# Altium PCB mt3608.PcbDoc
Units mm, origin at the board's own origin, x right, y up, seen from the top; angles counter-clockwise.
Board outline 25 x 30 mm, 2 copper layers (Top Layer, Bottom Layer), stack 1.671 mm thick; 7 components, 5 nets, 18 pads, 2 vias.
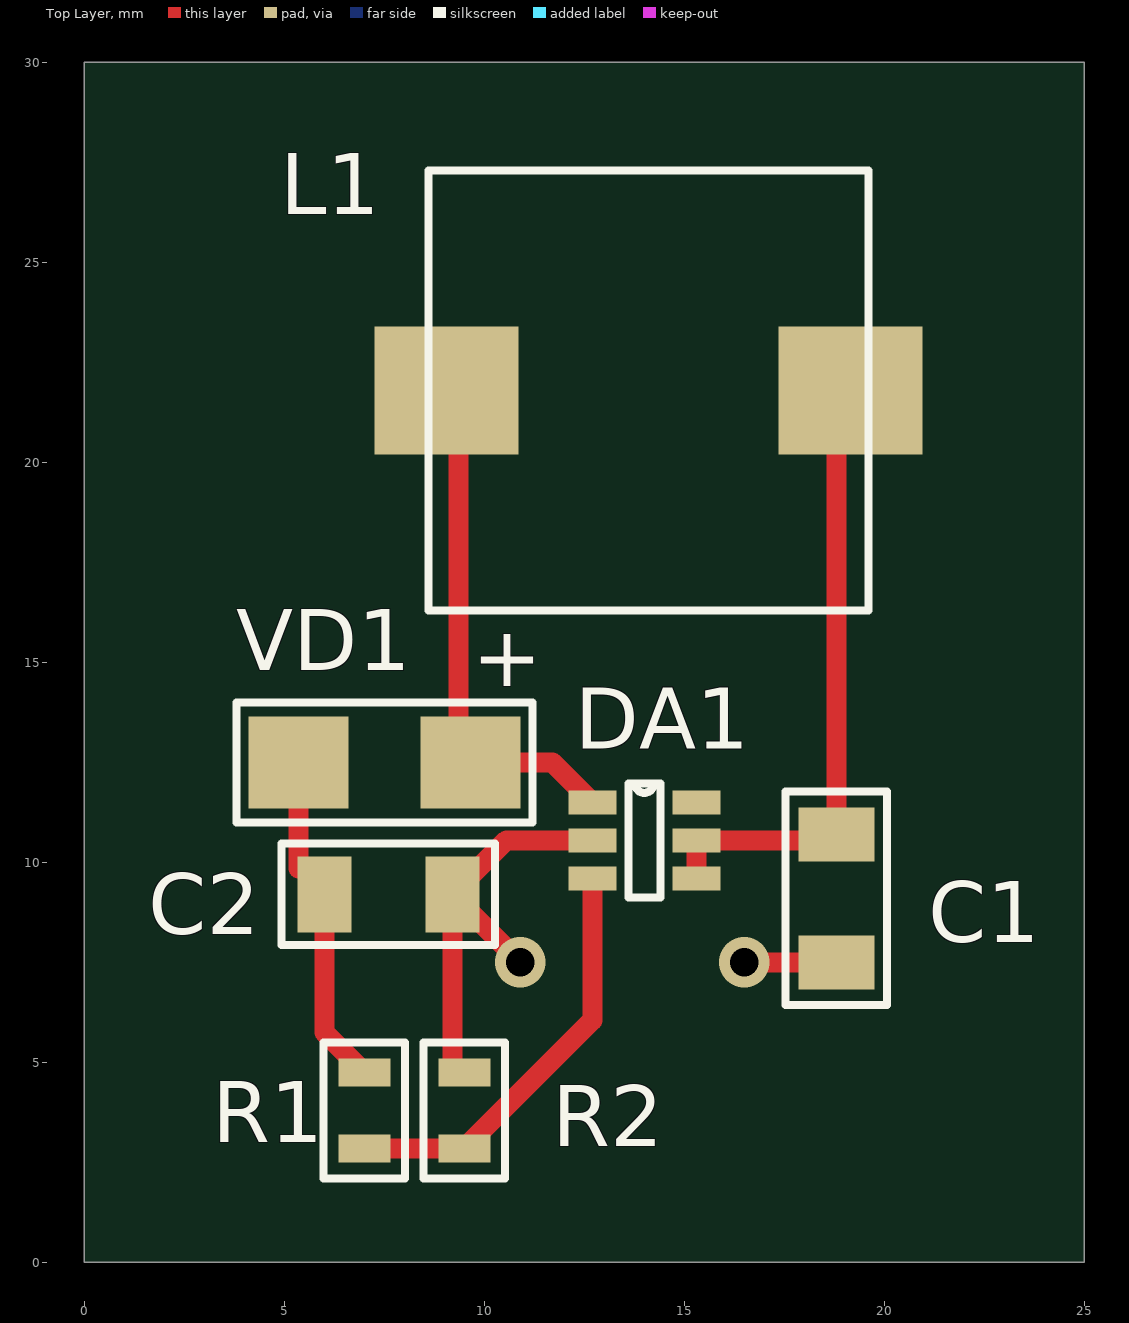
[diagram p0: Top Layer view]
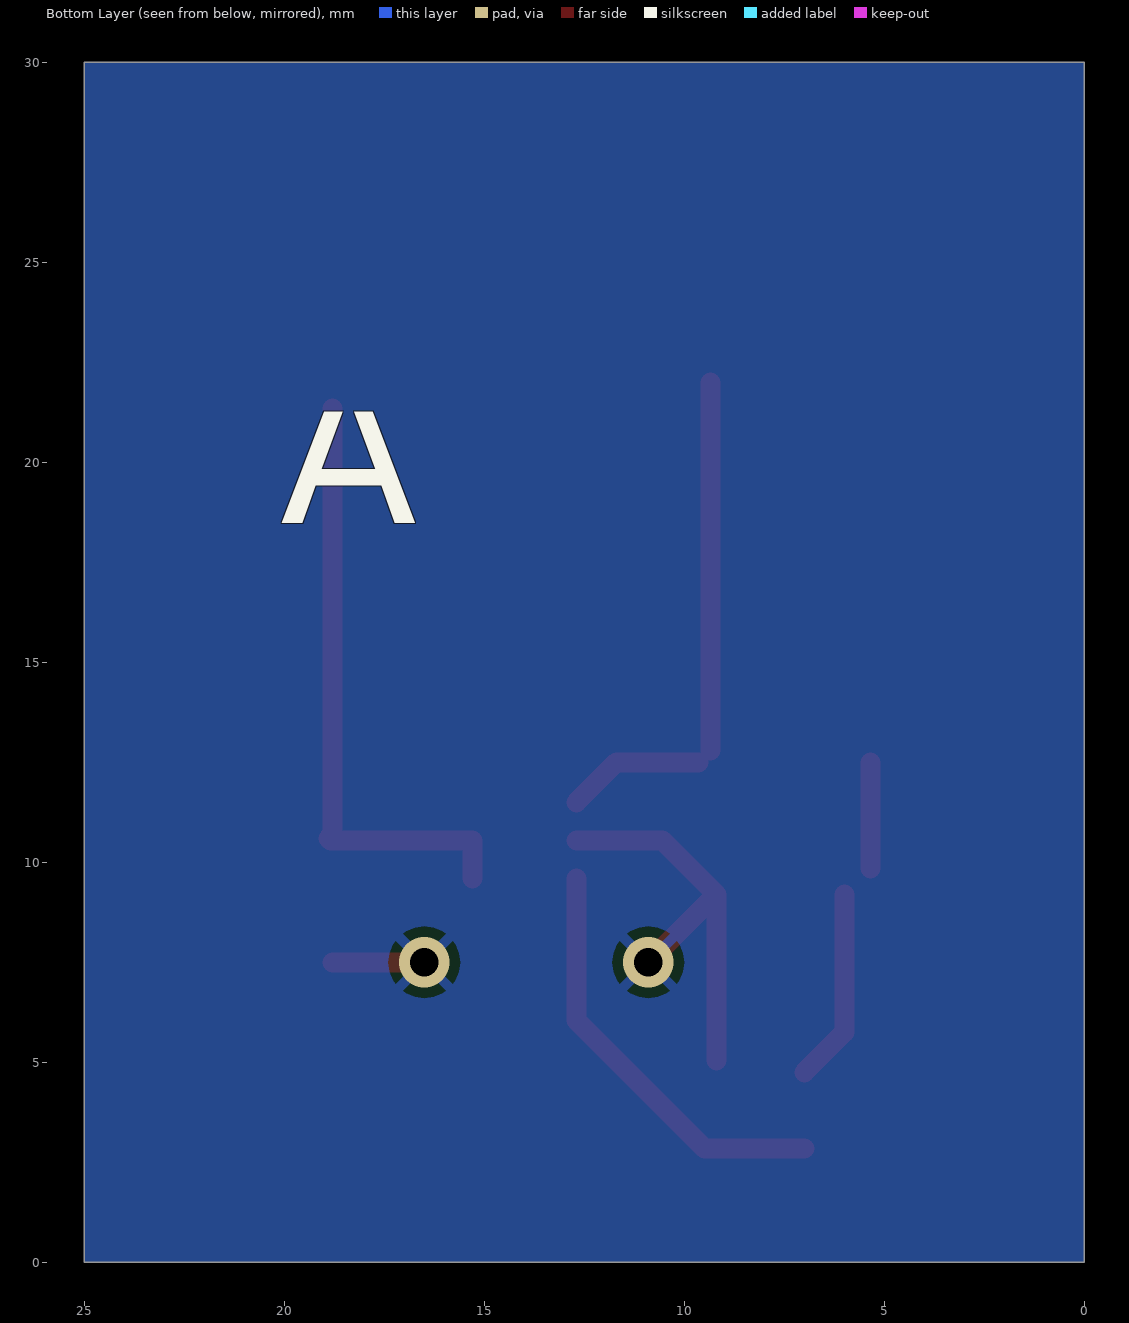
[diagram p1: Bottom Layer view, seen from below]
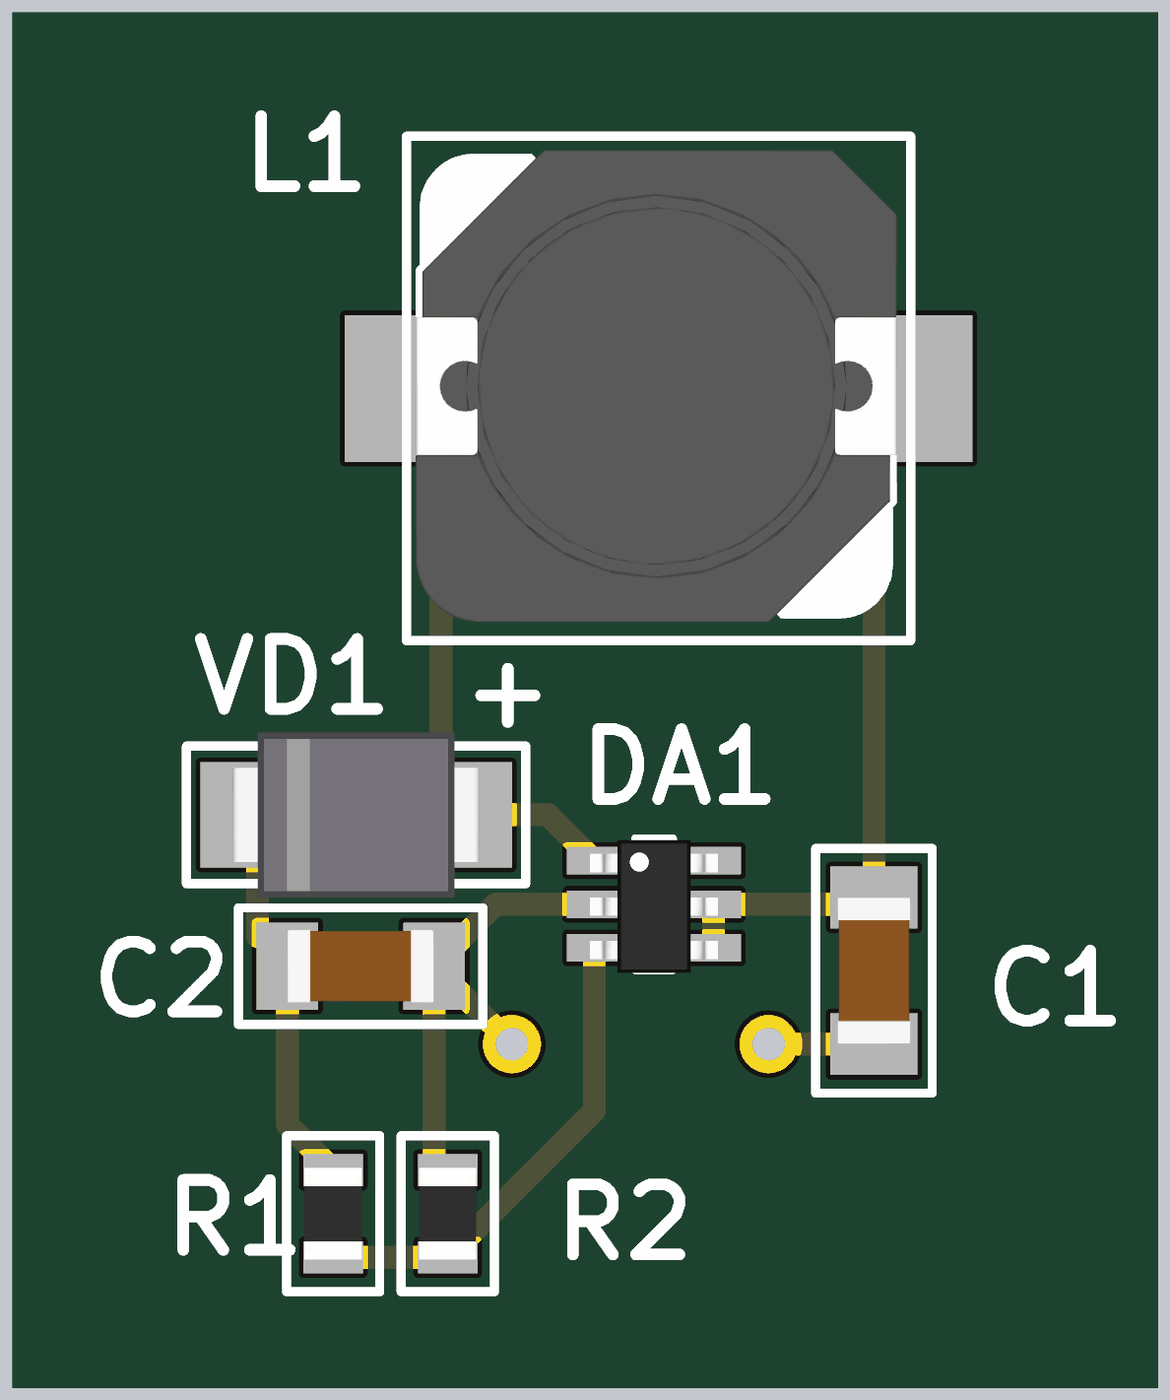
[diagram p2: 3D render of the assembled board from above, using the file's embedded part models]

## Layer stack, top to bottom
Top Solder: solder mask 0.0102, Solder Resist, Dk 3.5
Top Layer: signal copper 0.0356
Dielectric 1: dielectric 1.6, FR-4, Dk 4.8
Bottom Layer: signal copper 0.0356
Bottom Solder: solder mask 0.0102, Solder Resist, Dk 3.5

## Board outline
0,0 25,0 25,30 0,30

## Design rules (kind name [scope] priority, off if disabled: settings)
Clearance [All] p1: gap=0.3
Height [All] p1: minheight=0 maxheight=40 prefheight=12.7
PlaneConnect [All] p1: planeconnectstyle=Relief reliefexpansion=0.508 reliefentries=4 reliefconductorwidth=0.4 reliefairgap=0.4
PolygonConnect [All] p1: connectstyle=Relief reliefconductorwidth=0.254 reliefentries=4 polygonreliefangle="45 Angle" airgapwidth=0.254
RoomDefinition mt3608 [InComponentClass('mt3608')] p1: confinementstyle=ConfineIn formatcopy=TRUE lockcomponents=FALSE outline -100,-100 -49.2,-100 -49.2,-74.6 -100,-74.6
RoutingVias [All] p1: holewidth=0.3 width=0.7 viastyle="Through Hole" minholewidth=0.3 minwidth=0.7 maxholewidth=0.711 maxwidth=1.27
SolderMaskExpansion [All] p1: expansion=0.102
Width [All] p1: maxlimit=3 minlimit=0.3 preferedwidth=0.5
28 further rules are at their usual default settings.

## Components (designator, comment, footprint, x,y, rotation, side; value= is the part's Value field where it differs from the comment)
C1 "22u" C1206 18.8,9.1 r90 top
C2 "22u" C1206 7.6,9.2 r180 top
DA1 "MT3608" SOT23-6 12.7,11.5 r0 top
L1 "1uH" L_CDRH104R 14.1,21.8 r180 top
R1 "" R0805 7,3.8 r90 top
R2 "" R0805 9.5,3.8 r270 top
VD1 "VD_SMB" SMB 7.5,12.5 r180 top

## Footprints (in the part's own frame and the unit in brackets; to place one, negate y for a bottom-side part, rotate by r counter-clockwise, add the part's x,y. Pads: shape width x height; smd on the part's side, far side on the other; paste and mask are expansions set on the pad)
C1206 [mm]
  rect 1.35x1.9 smd: 1(-1.6,0) 2(1.6,0)
  silkscreen extent -2.67,-1.27 2.67,1.27, body extent -1.6,-0.8 1.6,0.8, height 1.6
L_CDRH104R [mm]
  rect 3.6x3.2 smd: 1(-5.05,0) 2(5.05,0)
  silkscreen extent -5.5,-5.5 5.5,5.5, body extent -5.2,-5.2 5.3,5.1, height 4
R0805 [mm]
  rect 0.7x1.3 smd: 1(-0.95,0) 2(0.95,0)
  silkscreen extent -1.7,-1.02 1.7,1.02, body extent -1,-0.62 1,0.63, height 0.6
SMB [mm]
  rect 2.5x2.3 smd: 1(-2.15,0) 2(2.15,0)
  silkscreen extent -3.7,-1.5 3.7,1.5, body extent -2.7,-1.8 2.7,1.8, height 2.3
SOT23-6 [mm]
  rect 1.2x0.6 smd: 1(0,0) 2(0,-0.95) 3(0,-1.9) 4(2.6,-1.9) 5(2.6,-0.95) 6(2.6,0)
  silkscreen extent 0.9,-2.38 1.7,0.48, body extent -0.1,-2.45 2.7,0.45, height 1.45

## Part data
C1 C2: library part C1210
L1: library part L_CDRH104R
R1 R2: library part R0805

## Via types
v1: diameter 1.27, hole 0.711, Top Layer to Bottom Layer, tented bottom, 2 vias

## Nets (pads, with @x,y where several pads share a name; then routed paths per layer and width w, separated by ;. In a path a pad name is that pad's centre, name@x,y a point inside that pad or via, vN(x,y) a via of type N, cw(c..) or ccw(c..) an arc to the next point about the centre after c; other vN are vias at no path point)
GND: C1.1 C2.1 DA1.2 R2.1 | length 12.9
  Top Layer w0.5: R2.1@9.2,5.05 C2.1 ; v1(10.9,7.5) C2.1 ; DA1.2 10.55,10.55 C2.1 ; v1(16.5,7.5) C1.1
NetC1_2: C1.2 DA1.4 DA1.5 L1.1 | length 15.4
  Top Layer w0.5: DA1.4 DA1.5 18.85,10.55 18.9,10.6 C1.2 L1.1@18.8,21.35
NetC2_2: C2.2 R1.2 VD1.2 | length 7.5
  Top Layer w0.5: C2.2@5.35,9.85 VD1.2 ; C2.2 6,5.75 R1.2
NetDA1_1: DA1.1 L1.2 VD1.1 | length 12.7
  Top Layer w0.5: VD1.1@9.35,12.8 L1.2@9.35,22 ; VD1.1 11.7,12.5 DA1.1
NetDA1_3: DA1.3 R1.1 R2.2 | length 10.6
  Top Layer w0.5: R1.1 R2.2 12.7,6.05 DA1.3
pads on no net: DA1.6

## Polygon pours and split planes (outlines as drawn)
GND on Bottom Layer "GND" (solid, pour order 0): 0,30 25,30 25,0 0,0 0,1 0,4

## Silkscreen, mask and mechanical layers (free items; w line width, h text height)
Bottom Overlay:
  text "A" at 20.1,16.2 h12

## Text inside footprints (layer, text, board x,y; h text height)
VD1: Top Overlay "+" at 9.7,15.7 h1.52 r180